# Altium PCB PC110-itx.PcbDoc (part 14 of 16)
Units mm, origin at the board's own origin, x right, y up, seen from the top; angles counter-clockwise.
Board outline 170 x 170 mm, 16 copper layers (FC1, FC2, FC3, FC4, IP1, IC1, IC2, IP2, IP3, IC3, IC4, IP4, BC4, BC3, BC2, BC1), stack 3.903 mm thick; 935 components, 1357 nets, 4698 pads, 3240 vias.
Unrouted connection lines stored in the file: 552.
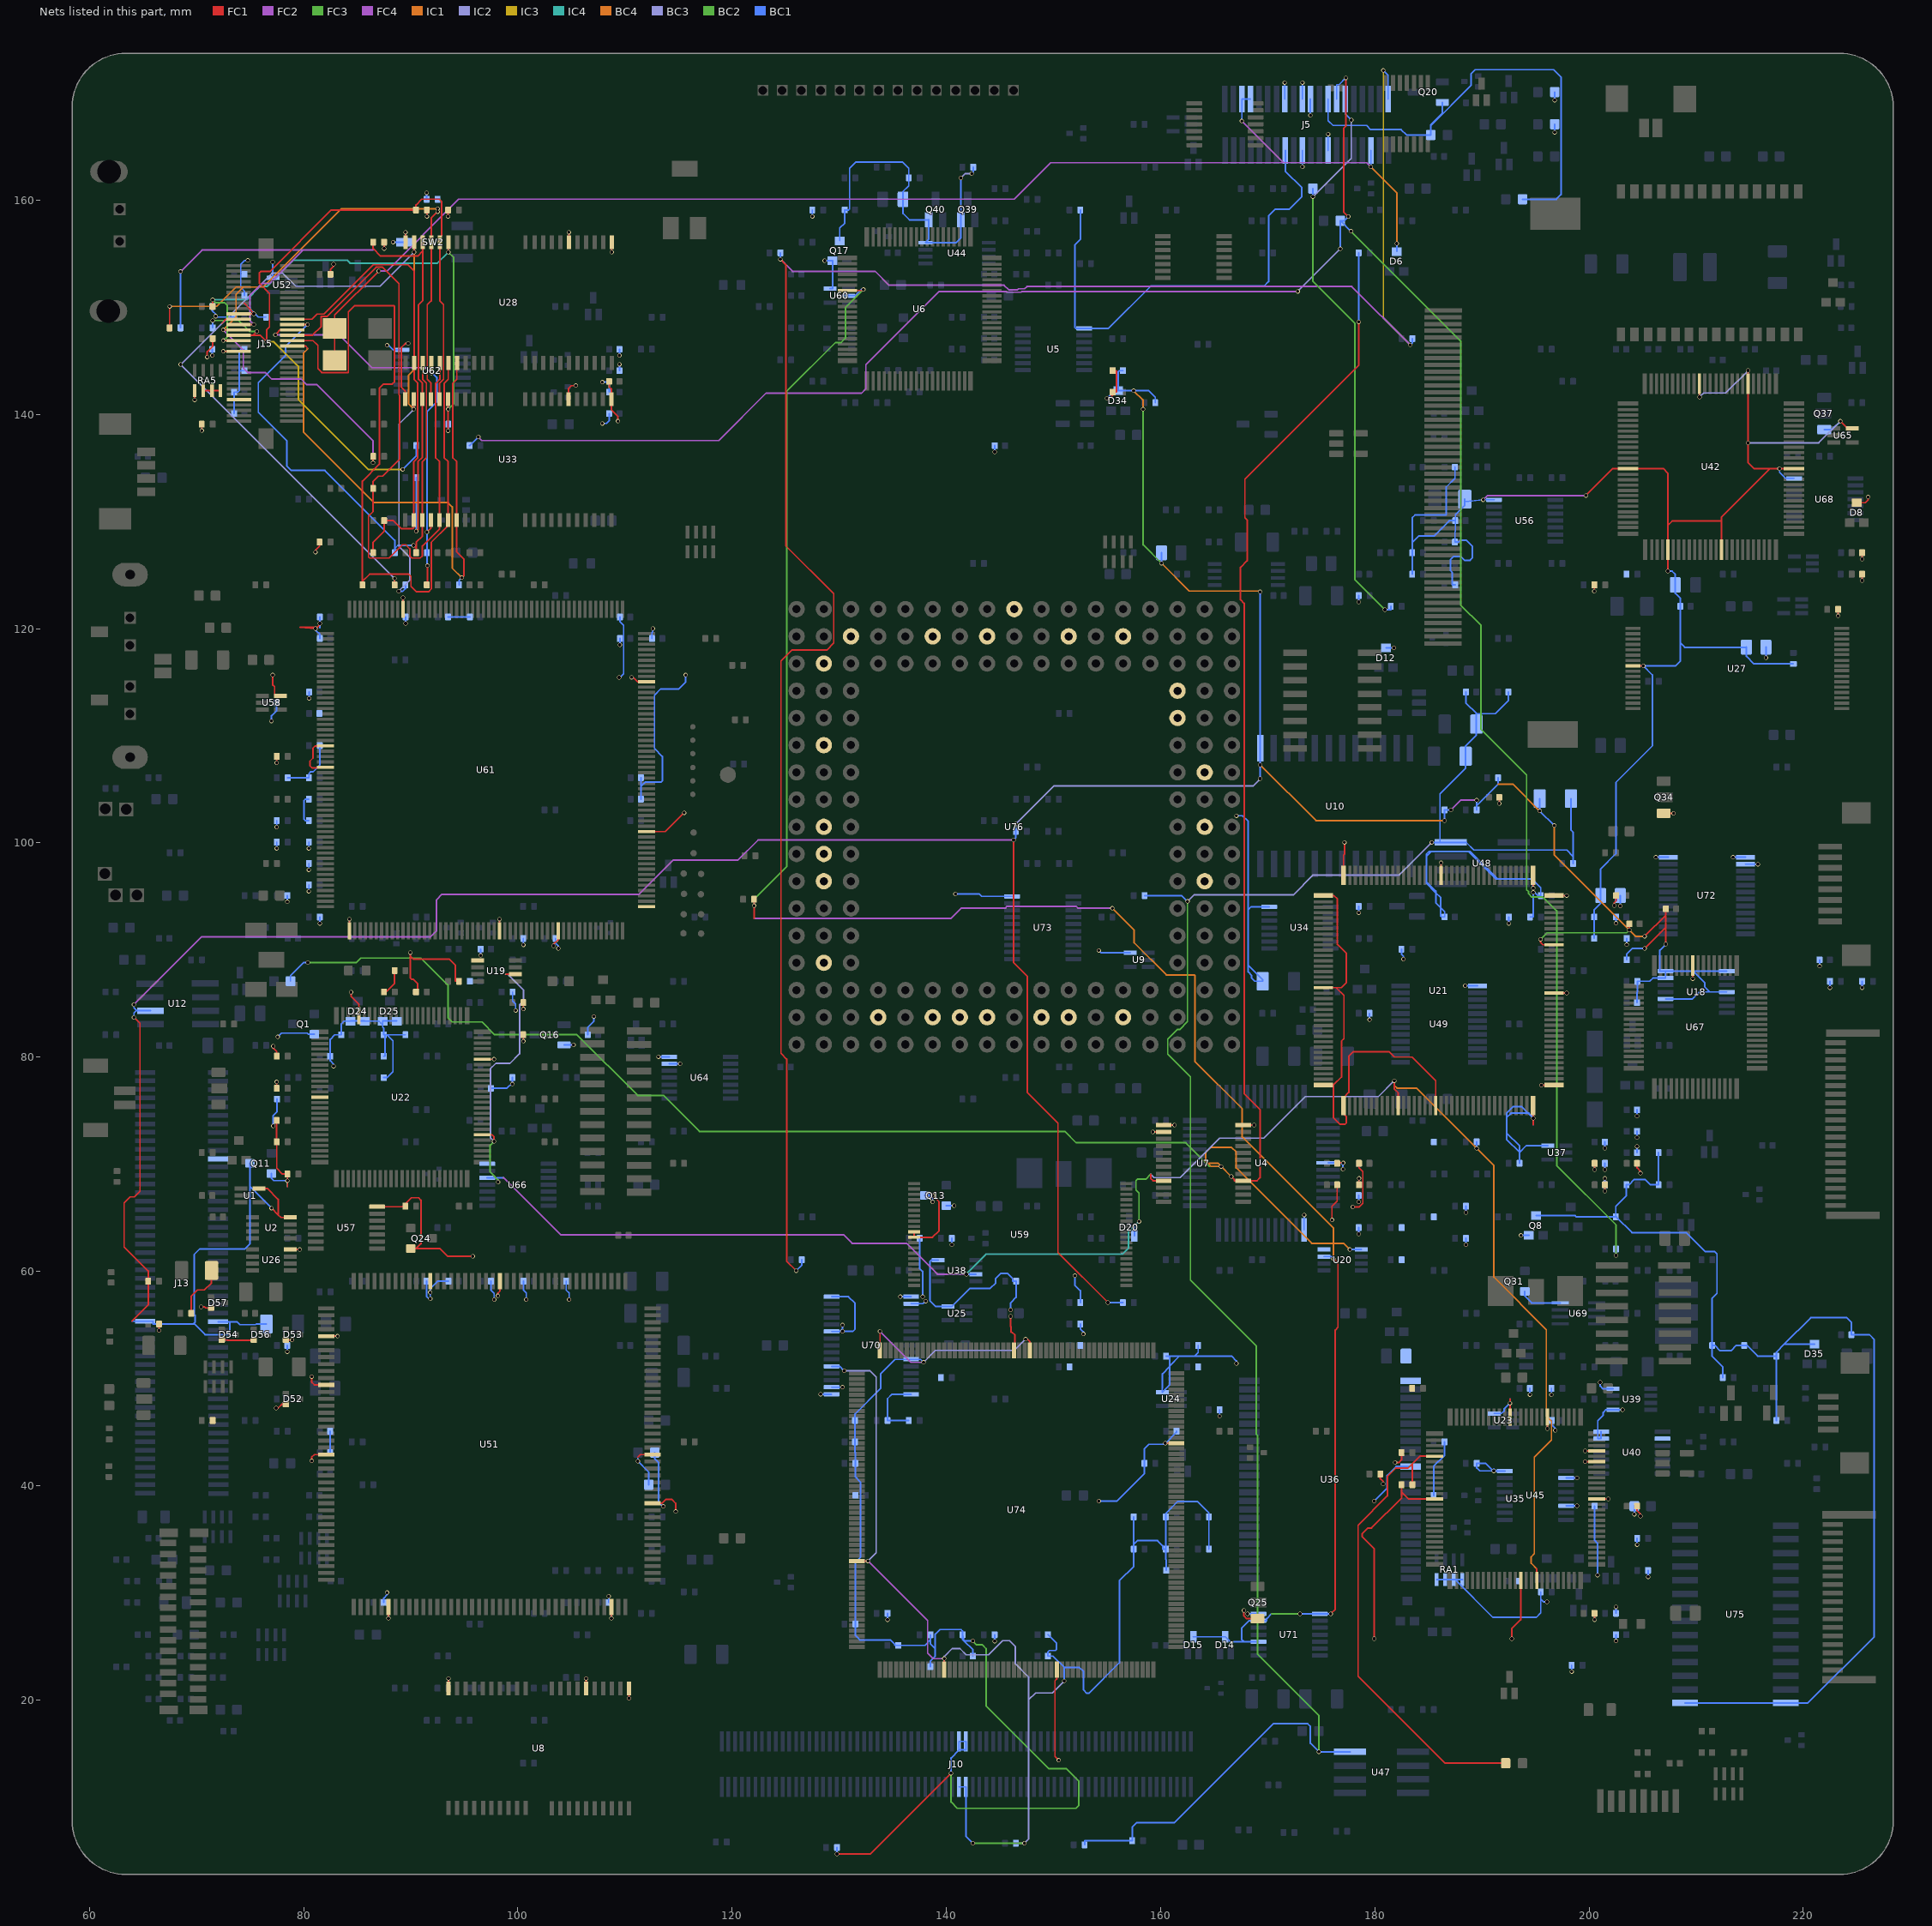
[diagram p27: the nets of this part, all layers, seen from the top]

## Via types
v1: diameter 0.4, hole 0.3, FC1 to BC1, 3240 vias

## Nets (pads, with @x,y where several pads share a name; then routed paths per layer and width w, separated by ;. In a path a pad name is that pad's centre, name@x,y a point inside that pad or via, vN(x,y) a via of type N, cw(c..) or ccw(c..) an arc to the next point about the centre after c; other vN are vias at no path point) (continued)
PNET1: C5.1 C17.1 C26.1 C31.2 C32.1 C34.1 C37.1 C38.1 C39.1 C40.1 C41.1 C42.2 C43.1 C64.2 C65.2 C69.1 C71.2 C72.1 C73.2 C74.2 C75.1 C77.2 C78.2 C83.1 C95.1 C101.2 C102.2 C103.1 C104.2 C105.1 C106.2 C107.2 C108.2 C109.2 C110.2 C111.1 C112.2 C113.2 C114.2 C115.2 C117.2 C121.1 C122.1 C123.1 C127.2 C128.1 C140.2 C156.2 C172.2 C208.2 C211.2 C212.1 C215.1 C219.1 C242.2 C247.1 C252.1 C253.1 C254.2 C255.2 C256.2 C274.1 C275.1 C280.2 D8.2 D44.1 D52.2 D53.2 D54.2 D56.2 D57.2 J5.8 J5.33 J15.5 J15.14 J15.21 L3.1 L6.2 Q13.2 Q31.2 R45.2 R59.2 R84.2 R94.1 R96.1 R102.1 R105.1 R109.1 R110.2 R117.1 R118.2 R120.1 R127.2 R148.2 R152.1 R156.1 R157.2 R158.2 R161.2 R162.2 R165.2 R173.1 R177.1 R182.1 R215.2 R216.1 R228.1 R229.2 R246.1 R249.1 R258.1 R287.2 R292.1 R310.2 R312.1 R349.2 R372.1 R393.1 R400.2 R401.2 R403.2 RA5.5 RA5.6 RA5.7 RA5.8 SW2.1 U7.1 U7.2 U8.1 U8.6 U8.20 U9.5 U19.1 U21.1 U21.18 U21.36 U21.37 U21.54 U21.72 U21.73 U21.90 U21.108 U21.109 U21.126 U21.144 U22.13 U22.70 U23.5 U25.5 U28.1 U28.6 U28.22 U33.1 U33.6 U33.22 U35.7 U35.14 U35.38 U35.64 U35.88 U35.95 U35.97 U37.5 U38.8 U39.5 U39.8 U40.2 U40.13 U40.14 U45.2 U45.6 U45.16 U49.1 U51.19 U51.29 U51.45 U51.52 U51.62 U51.86 U51.118 U51.132 U51.139 U52.5 U61.1 U61.94 U61.126 U61.130 U61.157 U61.185 U61.196 U62.14 U64.13 U64.14 U66.14 U67.57 U69.8 U70.15 U70.16 U70.17 U72.1 U72.2 U73.20 U74.27 U74.138 U74.195 U76.B7 U76.B9 U76.B11 U76.C4 U76.C5 U76.E2 U76.E16 U76.G2 U76.G16 U76.H16 U76.J1 U76.K2 U76.K16 U76.L16 U76.M2 U76.M16 U76.P16 U76.Q2 U76.R3 U76.R6 U76.R9 U76.R10 U76.R11 U76.R14 | length 420
  FC1 w0.15: v1(69.825,141.36) RA5.5@69.825,142.24 ; v1(70.435,56.693) 70.734,56.693 70.837,56.59 D57.2@71.35,56.59 ; v1(70.49,138.49) R102.1@70.49,139.09 ; v1(70.625,143.12) RA5.6@70.625,142.24 RA5.7@71.45,142.24 RA5.8@72.225,142.24 ; v1(71,145.367) 71,145.857 71.51,146.367 R157.2@71.51,147.09 ; D54.2@72.35,53.59 72.902,53.59 72.923,53.569 75.35,53.569 D56.2@75.35,53.59 ; v1(72.497,145.893) J15.14@73.928,145.893 ; J15.21@73.928,149.392 v1@75.351,149.392 ; 74.48,150.378 v1@75.354,149.396 ; v1(75.362,149.403) v1@75.355,149.396 ; v1(77.435,47.244) 77.613,47.244 77.959,47.59 D52.2@78.35,47.59 ; D53.2@78.35,53.59 v1(78.93,53.59) ; v1(80.75,42.305) 80.75,42.654 81.001,42.905 U51.62@82.13,42.905 ; v1(80.75,50.179) 80.75,49.656 81.001,49.405 U51.52@82.13,49.405 ; v1@81.102,119.873 v1(81.102,120.015) 79.654,120.142 81.28,120.142 v1@81.509,120.371 ; v1(81.102,127.155) 81.102,127.312 81.49,127.7 R94.1@81.49,128.09 ; U61.130@82.028,107.057 81.28,107.057 81.233,107.01 80.772,107.01 80.594,107.188 80.594,107.645 80.874,107.925 80.874,108.854 81.077,109.057 U61.126@82.028,109.057 ; U51.45@82.13,53.955 v1(83.175,53.955) ; R148.2@82.51,153.09 82.51,153.536 82.787,153.813 v1(82.787,154.025) ; U61.157@84.278,91.807 v1(84.278,92.887) ; v1(87.51,155.49) R401.2@87.51,156.09 ; v1(87.925,27.615) U51.86@87.925,28.66 ; U61.94@89.278,121.807 v1(89.278,122.887) ; U33.22@89.488,141.423 89.488,142.186 89.132,142.541 89.132,146.27 89.488,146.625 v1(89.764,146.625) ; U28.22@89.508,156.082 v1(89.508,157.013) ; v1(91.51,158.49) R400.2@91.51,159.09 ; v1@91.787,57.377 v1(91.825,57.445) ; v1(93.49,158.49) R105.1@93.49,159.09 ; U8.20@93.531,21.071 v1(93.531,22.001) ; U22.70@96.7,79.81 v1(97.78,79.81) ; v1(98.137,57.72) 98.137,57.977 98.325,58.165 U51.19@98.325,59.1 ; U61.185@98.278,91.807 v1(98.278,92.887) ; v1(103.327,90.392) 103.327,90.517 103.778,90.968 U61.196@103.778,91.807 ; U33.6@104.738,141.423 104.738,142.437 104.989,142.688 v1(105.409,142.688) ; U28.6@104.758,156.082 v1(104.758,157.013) ; U8.6@106.381,21.071 v1(106.381,22.001) ; C95.1@108.52,143.09 108.52,142.584 108.738,142.367 U33.1@108.738,141.423 108.738,140.419 109.346,139.81 v1(109.346,139.37) ; v1(108.725,27.615) U51.118@108.725,28.66 ; v1(108.758,155.152) U28.1@108.758,156.082 ; v1(110.381,20.141) U8.1@110.381,21.071 ; 111.19,42.654 111.441,42.905 U51.139@112.57,42.905 ; U51.132@112.57,38.355 113.448,38.355 113.803,38.71 114.383,38.71 114.738,38.355 v1(114.738,37.581) ; v1(145.999,55.804) 145.999,54.864 146.025,54.864 146.025,54.305 146.152,54.305 146.406,54.051 146.406,53.26 146.308,53.162 U74.27@146.308,52.619 ; U74.138@150.308,22.819 150.308,21.956 150.14,21.788 150.14,14.722 v1(150.495,14.367) ; v1(159.27,73.015) U7.2@160.288,73.015 ; U7.1@160.288,73.665 v1(161.305,73.665) ; v1(160.428,43.969) U74.195@161.458,43.969 ; U21.36@175.182,77.391 176.124,77.391 ; U21.18@175.209,86.488 176.378,86.488 ; U21.1@175.209,95.091 176.174,95.091 176.505,94.761 176.505,90.525 177.342,89.687 177.342,86.97 176.86,86.488 176.378,86.488 ; U21.144@177.082,96.966 177.082,98.876 177.165,98.959 v1(177.165,100.056) ; v1(179.934,25.705) 179.934,34.133 178.816,35.25 178.816,35.504 179.354,36.043 179.696,36.043 182.49,38.837 182.49,39.421 ; R158.2@180.51,41.09 180.51,40.644 180.787,40.367 v1(180.787,40.155) ; R228.1@182.49,40.09 182.49,39.421 ; U35.38@185.57,38.75 183.161,38.75 182.49,39.421 ; U21.54@185.682,75.491 185.682,77.817 183.489,80.01 181.839,80.01 181.331,80.518 178.003,80.518 177.571,80.086 177.571,76.708 177.082,76.219 U21.37@177.082,75.491 177.082,74.708 177.343,74.447 177.343,73.863 177.216,73.736 176.759,73.736 176.124,74.371 176.124,77.391 ; U21.126@186.182,96.966 v1(186.182,98.146) ; v1(191.615,103.677) C107.2@191.615,104.267 ; U35.14@192.62,46.4 192.62,48.09 ; v1(192.786,25.705) 192.786,26.649 193.62,27.483 U35.64@193.62,31.15 ; 194.782,73.701 194.782,74.295 U21.72@194.782,75.491 ; v1(194.782,95.38) U21.109@194.782,96.966 ; v1(195.552,77.391) U21.73@196.732,77.391 ; v1(196.12,45.32) U35.7@196.12,46.4 ; U21.90@196.732,85.991 v1(197.912,85.991) ; U21.108@196.732,95.091 v1(197.912,95.091) ; v1(199.64,42.25) U35.95@200.72,42.25 ; v1(199.64,43.25) U35.97@200.72,43.25 ; v1(200.51,27.49) R127.2@200.51,28.09 ; v1(200.52,69.5) C105.1@200.52,70.09 ; U35.88@200.72,38.75 v1(201.8,38.75) ; v1(201.48,67.5) C101.2@201.48,68.09 ; v1(202.362,94.165) 202.362,94.437 202.52,94.595 C103.1@202.52,95.09 ; C112.2@204.48,38.09 204.48,37.669 204.787,37.362 v1(204.787,37.165) ; C104.2@204.48,70.09 204.48,69.669 204.787,69.362 v1(204.787,69.165) ; v1(209.685,87.328) U67.57@209.685,88.558 ; v1(223.25,121.2) R84.2@223.25,121.8 ; D8.2@224.98,131.76 225.794,131.76 226.045,132.011 v1(226.045,132.283) ; v1(225.48,124.5) C102.2@225.48,125.09 ; v1(225.48,126.5) C106.2@225.48,127.09 ; v1@75.351,149.392 v1@75.355,149.396 ; v1@75.351,149.392 v1(75.358,149.392) v1@75.355,149.396 ; 176.124,77.391 176.133,77.391 176.897,78.156 176.897,81.52 177.114,81.737 177.114,85.751 176.378,86.488
  BC1 w0.15: v1(71.48,145.5) C75.1@71.48,146.09 ; C69.1@71.48,150.09 71.48,149.67 71.787,149.362 71.787,149.235 v1(71.78,149.174) ; C280.2@73.52,140.09 C255.2@73.52,142.09 73.863,142.09 73.99,142.217 73.99,143.967 ; C109.2@73.52,149.09 v1@71.865,149.09 ; C43.1@74.48,144.09 74.113,144.09 73.99,143.967 ; C39.1@74.48,146.09 74.168,146.09 73.99,145.912 73.99,143.967 ; 74.48,150.378 75.768,149.09 R287.2@76.49,149.09 ; C122.1@74.48,151.09 74.48,151.513 74.125,151.868 74.125,154.022 74.48,154.377 v1(74.787,154.377) ; v1(77.114,154.229) 77.114,152.74 U52.5@77.15,152.74 ; v1(78.48,52.5) C252.1@78.48,53.09 ; v1@81.102,119.873 81.52,119.455 C71.2@81.52,119.09 ; v1@81.509,120.371 v1(81.509,120.498) 81.52,120.094 C117.2@81.52,121.09 ; C41.1@82.48,43.09 C38.1@82.48,45.09 ; C32.1@87.48,29.09 87.48,29.51 87.787,29.818 v1(87.787,30.015) ; v1(87.785,146.452) 87.93,146.452 88.342,146.04 U62.14@89.137,146.04 ; v1(88.345,156.09) SW2.1@89.425,156.09 ; v1(89.52,120.5) C156.2@89.52,121.09 ; C247.1@91.48,59.09 91.48,57.685 v1@91.787,57.377 ; R403.2@91.49,160.09 v1(91.49,160.69) ; v1(91.825,57.445) v1(91.821,58.039) 91.821,58.404 92.507,59.09 C127.2@93.52,59.09 ; C34.1@93.48,121.09 93.48,121.082 94.048,121.082 94.056,121.09 C172.2@95.52,121.09 ; v1(96.52,89.5) C77.2@96.52,90.09 ; C37.1@97.48,59.09 97.48,58.276 97.787,57.968 v1(97.787,57.377) ; C72.1@97.48,77.09 98.958,77.09 v1@99.49,77.622 ; v1(99.49,77.49) v1@99.49,77.622 ; R110.2@99.49,78.09 v1@99.49,77.622 ; R96.1@99.51,86.09 99.51,85.251 99.787,84.973 v1(99.787,84.367) ; v1(100.51,90.49) R249.1@100.51,91.09 ; C74.2@100.52,59.09 100.52,58.256 100.787,57.989 v1(100.787,57.377) ; R246.1@103.51,91.09 103.51,90.644 103.787,90.367 v1(103.787,90.155) ; R393.1@104.51,59.09 104.51,58.251 104.787,57.973 v1(104.787,57.367) ; v1(107.874,139.165) 108.269,139.165 108.52,139.416 C64.2@108.52,140.09 ; v1(107.874,143.015) 108.269,143.015 108.52,142.764 C108.2@108.52,142.09 ; C26.1@108.48,29.09 v1(108.48,29.68) ; v1(109.449,115.44) 109.52,115.44 109.875,115.795 109.875,120.312 109.52,120.667 C110.2@109.52,121.09 ; C121.1@109.48,144.09 v1(109.48,144.68) ; v1(109.48,145.5) C219.1@109.48,146.09 ; v1(109.52,118.5) C113.2@109.52,119.09 ; 111.19,42.654 v1(111.201,42.291) 112.213,41.28 L6.2@112.213,40.09 ; C17.1@111.48,104.09 111.48,105.258 ; C40.1@111.48,106.09 111.48,105.258 ; C254.2@112.52,119.09 112.52,119.625 112.598,119.703 v1(112.598,120.015) ; L3.1@112.787,43.09 112.787,42.502 113.143,42.147 113.143,38.418 113.498,38.063 v1(113.575,38.063) ; v1(113.12,80.04) U64.14@114.137,80.04 ; U64.13@114.137,79.39 v1(115.155,79.39) ; v1(115.672,115.672) 115.672,115.011 115.037,114.376 113.335,114.376 112.751,113.792 112.751,108.814 113.487,108.077 113.487,105.791 113.386,105.689 111.912,105.689 111.48,105.258 ; v1(128.27,48.54) U70.16@129.288,48.54 ; U70.17@129.288,49.19 v1(130.305,49.19) ; v1(134.51,27.49) R177.1@134.51,28.09 ; R162.2@136.49,46.09 136.49,46.076 134.51,46.076 R117.1@134.51,46.09 134.51,48.125 134.925,48.54 U70.15@136.713,48.54 ; U38.8@139.25,61.04 138.582,61.04 138.481,60.938 138.481,57.248 138.989,56.74 U25.5@140.15,56.74 140.538,56.74 142.218,58.42 144.094,58.42 144.602,58.928 144.602,59.334 145.085,59.817 145.694,59.817 146.177,59.334 146.177,59.09 R120.1@146.51,59.09 146.51,57.58 146,57.07 v1(146,56.402) ; Q13.2@140,66.14 v1(140.73,66.14) ; v1(140.51,62.49) R216.1@140.51,63.09 ; v1(140.848,95.24) 143.055,95.24 143.28,95.015 U73.20@146.137,95.015 ; v1(144.51,25.49) R312.1@144.51,26.09 ; v1(144.52,136.5) C65.2@144.52,137.09 ; v1(154.229,38.557) 155.905,38.557 158.49,41.142 R165.2@158.49,42.09 158.49,43.453 158.902,43.866 v1@160.376,43.866 ; v1(154.229,89.967) 154.456,89.74 U9.5@157.15,89.74 ; v1(160.428,43.969) v1@160.376,43.866 ; C5.1@161.48,45.09 161.48,44.97 160.453,43.944 v1@160.376,43.866 ; J5.8@171.59,169.45 v1(171.59,170.98) ; J5.33@175.64,164.65 v1(175.64,166.18) ; v1(179.51,83.49) R258.1@179.51,84.09 ; R349.2@182.49,90.09 182.49,89.599 182.677,89.412 v1(182.677,89.155) ; R161.2@185.49,39.09 185.49,41.804 186.51,42.824 R173.1@186.51,44.09 ; v1(188.445,86.665) U49.1@189.6,86.665 ; U23.5@191.15,46.74 191.821,46.74 192.075,46.994 192.075,47.168 v1(192.608,47.701) 192.62,48.09 ; U45.16@192.137,41.365 191.309,41.365 191.12,41.554 v1(191.11,41.377) v1@191.036,41.377 ; v1(192.51,92.49) R372.1@192.51,93.09 ; R109.1@193.51,70.09 193.51,71.12 ; Q31.2@194,58.14 194,57.709 194.644,57.065 U69.8@197.3,57.065 ; v1(194.48,48.5) C253.1@194.48,49.09 ; R118.2@194.49,93.09 194.793,93.09 v1@194.793,95.504 ; 194.782,73.701 v1(194.793,74.295) ; v1(194.782,95.38) v1@194.793,95.504 ; v1(194.793,95.783) 194.742,95.834 194.742,96.52 194.615,96.647 ; U37.5@196.15,71.74 194.13,71.74 193.51,71.12 ; v1(196.49,48.49) R229.2@196.49,49.09 ; C31.2@196.52,46.09 196.52,45.681 196.85,45.351 v1(196.85,45.165) ; v1(196.788,166.335) D44.1@196.788,167.09 ; U45.6@197.862,38.115 v1(198.88,38.115) ; U45.2@197.862,40.715 v1(198.88,40.715) ; C42.2@200.52,38.09 200.52,34.893 200.787,34.626 v1(200.787,31.653) ; v1(201.035,49.64) 201.035,49.291 201.286,49.04 U39.8@202.25,49.04 ; U40.13@201.138,44.39 U40.13@201.117,44.39 ; U40.14@201.138,45.04 201.117,45.04 U40.13@201.117,44.39 ; C128.1@201.48,68.09 v1(201.48,68.68) ; v1(201.48,69.5) C275.1@201.48,70.09 ; v1(201.48,71.5) C111.1@201.48,72.09 ; R156.1@202.51,28.09 v1(202.51,28.69) ; v1(202.52,25.5) C73.2@202.52,26.09 ; v1(202.52,92.5) C208.2@202.52,93.09 ; v1(202.913,94.11) R292.1@202.913,95.09 ; v1(203.13,47.09) U39.5@202.25,47.09 201.574,47.09 201.32,46.836 201.32,46.584 200.812,46.076 200.812,44.39 U40.13@201.117,44.39 ; v1(203.52,90.5) C211.2@203.52,91.09 ; v1(204.225,37.335) C140.2@204.225,38.09 ; C274.1@204.48,71.09 v1(204.48,71.68) ; v1(204.48,72.5) C215.1@204.48,73.09 ; v1(204.48,74.5) C212.1@204.48,75.09 ; v1(204.49,34.49) R215.2@204.49,35.09 ; v1(205.51,31.49) R152.1@205.51,32.09 ; v1(213.445,98.665) U72.1@214.6,98.665 ; U72.2@214.6,98.015 v1(215.755,98.015) ; v1(221.52,88.5) C256.2@221.52,89.09 ; v1(222.49,86.49) R45.2@222.49,87.09 ; v1(225.49,86.49) R59.2@225.49,87.09 ; v1(71.78,149.174) v1@71.865,149.09 ; v1(71.78,149.174) v1(71.787,149.165) v1@71.865,149.09 ; 184.81,96.393 184.81,98.755 ; 184.81,96.393 184.81,96.241 185.699,95.352 ; 184.81,96.393 185.699,95.504 185.699,95.352 ; 184.81,98.755 184.81,98.958 185.064,99.212 185.268,99.212 ; 184.81,98.755 185.268,99.212 ; 185.268,99.212 188.722,99.212 ; 185.699,95.352 186.131,94.92 186.131,93.98 ; 185.699,95.352 185.699,94.412 186.131,93.98 ; 186.131,93.98 186.131,93.192 186.233,93.09 C78.2@186.52,93.09 186.52,93.591 186.131,93.98 ; 188.722,99.212 188.874,99.212 191.44,96.647 ; 188.722,99.212 191.287,96.647 191.44,96.647 ; v1@191.036,41.377 189.789,41.377 189.51,41.655 R182.1@189.51,42.09 190.322,42.09 v1@191.036,41.377 ; 191.44,96.647 194.615,96.647 ; 192.303,72.936 192.303,74.371 ; 192.303,72.936 192.303,72.327 193.51,71.12 ; 192.303,72.936 193.51,71.73 193.51,71.12 ; 192.303,74.371 192.303,74.778 192.913,75.387 193.7,75.387 194.31,74.778 ; 192.303,74.371 192.71,74.778 194.31,74.778 ; 194.31,74.778 194.386,74.778 194.793,74.371 v1(194.793,74.295) ; 194.31,74.778 v1(194.793,74.295) ; 194.615,96.647 194.666,96.647 195.49,95.823 R310.2@195.49,95.09 195.207,95.09 194.849,95.447 v1@194.793,95.504
PNET2: C2.1 C3.1 C68.1 C203.2 C204.2 C205.1 C235.1 C237.1 D34.2 J13.21 J13.80 Q11.3 R28.2 R107.2 R108.1 R183.1 R195.1 R243.1 R244.1 R245.1 R256.2 R354.2 U1.5 U2.8 U10.1 U12.6 U18.1 U18.4 U18.10 U18.13 U18.14 U21.99 | length 396.8
  FC1 w0.15: 63.963,55.352 65.49,56.879 R183.1@65.49,59.09 65.49,60.046 63.246,62.29 63.246,66.396 63.805,66.954 64.211,66.954 64.719,67.462 64.719,83.16 v1(64.16,83.718) ; U1.5@75.85,67.74 76.606,67.74 77.622,66.724 77.622,65.294 ; v1(77.003,65.913) 77.622,65.294 ; U2.8@78.75,65.04 77.876,65.04 77.622,65.294 ; v1(146.279,100.279) 146.279,88.824 147.549,87.554 147.549,76.708 150.419,73.838 150.419,61.764 v1(155.092,57.09) ; v1(154.991,141.503) 155.245,141.503 155.52,141.779 C235.1@155.52,142.09 155.88,142.09 155.88,144.09 C3.1@155.52,144.09 ; v1(195.478,91.008) 195.478,90.694 195.682,90.491 U21.99@196.732,90.491 ; v1(203.764,91.866) C2.1@203.764,92.456 ; v1(205.181,90.145) 207.165,92.128 ; v1(205.184,91.285) 207.165,93.266 ; v1(207.165,90.55) 207.165,92.128 ; C237.1@207.165,93.853 207.165,93.266 ; 207.165,92.128 207.165,93.266
  FC2 w0.15: v1(64.16,84.912) 70.485,91.237 91.846,91.237 92.405,91.796 92.405,94.691 92.913,95.199 111.303,95.199 114.503,98.4 120.548,98.4 122.428,100.279 v1(146.279,100.279) ; v1(187.11,103.09) 188.008,103.988 v1(189.51,103.988)
  FC3 w0.15: v1(158.369,140.487) 158.369,127.828 v1(160.088,126.11)
  IC1 w0.15: v1(160.088,126.11) 162.678,123.52 169.224,123.52 v1(169.3,123.444) ; v1(196.759,101.625) 196.759,98.871 v1(203.764,91.866)
  IC2 w0.15: v1(146.49,101.778) 150.021,105.308 168.614,105.308 v1(169.3,105.994)
  BC2 w0.15: v1(195.478,91.008) 196.088,91.618 203.516,91.618 v1(203.764,91.866)
  BC4 w0.15: v1(157.48,142.215) 158.369,141.326 v1(158.369,140.487) ; v1(169.3,107.281) 174.498,102.083 v1(186.512,102.083) ; 191.51,105.492 191.51,105.49 192.882,105.49 v1(195.388,102.985) ; v1(203.764,91.866) 204.345,91.285 v1(205.184,91.285)
  BC1 w0.15: 63.963,55.352 J13.80@65.207,55.352 65.938,55.352 65.938,55.093 69.698,55.093 ; v1(64.16,83.718) 64.16,84.125 64.395,84.359 ; v1(64.16,84.912) 64.16,84.594 64.395,84.359 ; J13.21@72.008,55.303 72.993,55.303 ; Q11.3@75,70.09 75,67.916 ; C204.2@76.525,55.09 75.57,55.09 75.51,55.03 74.031,55.03 73.759,55.303 72.993,55.303 ; v1(77.003,65.913) 75,67.916 ; v1(146.279,100.279) 146.49,100.491 R354.2@146.49,101.09 v1(146.49,101.778) ; v1(154.991,141.503) 155.499,142.011 155.499,142.215 D34.2@156.05,142.215 ; v1(155.092,57.09) R107.2@156.49,57.09 ; C68.1@156.48,144.09 156.159,144.09 156.05,143.981 D34.2@156.05,142.215 ; R195.1@159.51,141.09 159.51,141.607 158.902,142.215 v1(157.48,142.215) D34.2@156.05,142.215 ; v1(160.088,126.11) R256.2@160.088,127.09 ; v1(169.3,105.994) v1(169.3,107.281) U10.1@169.3,108.84 v1(169.3,123.444) ; v1(186.512,102.083) 186.51,102.085 R245.1@186.51,103.09 v1(187.11,103.09) ; R244.1@189.51,103.09 189.51,103.492 ; v1(189.51,103.988) 189.51,103.492 ; R243.1@191.51,106.09 191.51,105.492 189.51,103.492 ; R28.2@195.388,104.14 v1(195.388,102.985) v1(196.759,101.625) ; C203.2@203.52,89.09 203.52,89.652 204.013,90.145 v1(205.181,90.145) ; C205.1@204.48,85.09 204.48,86.055 204.51,86.085 R108.1@204.51,87.09 205.664,87.09 205.964,87.39 U18.13@207.138,87.39 U18.14@207.138,88.04 ; U18.10@207.138,85.44 209.662,85.44 210.312,86.09 211.258,86.09 ; v1(207.165,90.55) 206.604,89.989 206.604,88.04 U18.14@207.138,88.04 ; U18.4@212.863,86.09 211.258,86.09 ; U18.1@212.863,88.04 209.702,88.04 ; 64.395,84.359 64.414,84.34 U12.6@65.7,84.34 64.395,84.359 ; 69.698,55.093 69.798,55.093 70.789,54.102 73.113,54.102 73.113,55.182 72.993,55.303 ; 69.698,55.093 69.875,55.27 69.875,55.908 69.779,56.005 69.779,61.574 70.307,62.103 74.517,62.103 75,62.586 75,67.916 ; U18.14@207.138,88.04 209.702,88.04 ; 209.702,88.04 210.785,86.957 210.785,86.563 211.258,86.09
PNET3: C136.1 D35.2 Q8.2 R196.2 R197.2 R198.2 R200.2 R201.2 R203.2 R204.2 R205.2 R206.2 U75.1 U75.28 | length 116.3
  BC1 w0.15: Q8.2@195.05,65.215 198.704,65.215 198.829,65.09 R196.2@202.49,65.09 ; R206.2@206.49,71.09 R201.2@206.49,68.09 205.722,68.09 205.232,68.58 204.223,68.58 203.733,68.09 R205.2@203.49,68.09 203.49,67.065 202.49,66.065 R196.2@202.49,65.09 ; U75.1@208.955,19.71 U75.28@218.38,19.71 220.421,19.71 226.619,25.908 226.619,53.645 226.174,54.09 C136.1@224.48,54.09 224.48,55.27 224.074,55.677 220.699,55.677 218.237,53.215 ; R198.2@212.49,50.09 212.49,51.079 211.49,52.079 R204.2@211.49,53.09 ; R197.2@217.49,46.09 R200.2@217.49,52.09 ; D35.2@221.05,53.215 218.237,53.215 ; R196.2@202.49,65.09 202.54,65.09 204.003,63.627 209.067,63.627 210.845,61.849 211.734,61.849 211.938,61.646 211.938,57.963 211.49,57.515 R204.2@211.49,53.09 ; R204.2@211.49,53.09 211.734,53.09 212.221,52.603 213.258,52.603 213.745,53.09 R203.2@214.49,53.09 214.732,53.09 215.732,52.09 R200.2@217.49,52.09 ; R200.2@217.49,52.09 217.49,52.468 218.237,53.215
PNET4: D6.2 D39.1 D55.1 J5.3 J5.4 J5.38 | length 125.8
  FC1 w0.15: D55.1@82.9,145.04 D39.1@82.9,148.04 82.9,149.276 v1(87.015,153.391)
  FC2 w0.15: v1(87.015,153.391) 87.77,153.391 94.476,160.096 146.355,160.096 149.758,163.5 171.476,163.5 ; v1(167.59,167.386) 171.476,163.5 ; v1(179.629,163.119) 179.248,163.5 171.476,163.5
  IC1 w0.15: v1@179.64,163.13 v1(179.629,163.119) 182.05,160.698 v1(182.05,155.948)
  BC1 w0.15: v1(167.59,167.386) J5.3@167.59,169.45 J5.4@168.39,169.45 ; v1@179.64,163.13 J5.38@179.64,164.65 ; D6.2@182.05,155.215 v1(182.05,155.948)
PNET5: C19.2 C33.1 C35.2 C84.1 C90.2 C91.1 C120.1 C243.1 C244.2 C265.2 C276.1 D12.2 D24.1 D24.3 D25.1 D25.3 D48.1 F2.2 J5.10 J5.11 J5.30 J13.40 Q1.2 Q8.1 Q11.2 Q16.2 Q17.1 Q24.2 Q25.3 Q34.3 R39.2 R47.1 R48.2 R50.1 R54.1 R55.2 R56.2 R64.1 R65.1 R88.2 R122.1 R123.1 R124.1 R125.2 R135.2 R188.2 R192.2 R193.2 R226.2 R302.1 R303.1 R305.1 R306.1 R307.1 R309.1 R311.2 R315.2 R363.2 U4.20 U4.27 U7.24 U20.8 U22.96 U26.8 U34.14 U57.14 U60.5 U70.1 U70.2 U70.25 U70.30 U71.14 U72.24 | length 144.9
  FC1 w0.15: v1(66.51,54.49) R311.2@66.51,55.09 ; R135.2@69.51,56.09 69.51,57.709 70.069,58.268 70.74,58.268 71.4,58.928 F2.2@71.4,60.09 ; v1(77.165,81.025) 77.165,80.837 77.49,80.512 R124.1@77.49,80.09 ; R122.1@77.49,74.09 77.47,74.09 77.47,72.09 R307.1@77.49,72.09 77.49,69.629 78.029,69.09 R302.1@78.49,69.09 78.49,67.88 ; R123.1@77.49,77.09 v1(77.49,77.69) ; U26.8@78.75,62.04 v1(79.63,62.04) ; v1(84.426,86.063) 84.426,85.68 85.15,84.956 U22.96@85.15,83.86 ; U57.14@86.863,66.04 89.205,66.04 ; R303.1@87.49,86.09 87.706,86.09 88.49,86.874 R305.1@88.49,88.09 ; R306.1@89.49,66.09 89.49,66.04 89.205,66.04 ; v1(89.967,89.764) 89.967,89.408 ; Q24.2@90,62.14 90.512,62.14 ; R309.1@90.49,86.09 90.653,86.09 90.653,86.843 90.221,87.274 90.068,87.274 89.967,87.376 89.967,89.408 ; R192.2@94.51,87.09 94.158,87.09 94.158,88.595 93.599,89.154 90.221,89.154 89.967,89.408 ; v1(95.79,61.417) 93.438,61.417 92.715,62.14 90.512,62.14 ; v1(100.51,81.49) R193.2@100.51,82.09 ; v1(100.51,84.49) R188.2@100.51,85.09 ; U7.24@167.712,73.665 v1(168.73,73.665) ; v1(167.785,28.346) 167.785,27.841 168.036,27.59 Q25.3@169.05,27.59 ; v1(176,64.803) 176,66.095 176.48,66.575 C265.2@176.48,68.09 ; C90.2@176.48,70.09 176.48,70.129 v1(177.038,70.129) ; v1(177.952,66.015) 178.52,66.015 178.875,66.37 178.875,69.312 178.52,69.667 C91.1@178.52,70.09 ; C243.1@178.52,68.09 v1(178.52,68.68) ; Q34.3@206.965,102.767 v1(207.895,102.767) ; 89.205,66.04 90.043,66.878 90.729,66.878 90.957,66.65 90.957,62.586 90.512,62.14
  BC1 w0.15: Q11.2@77,69.14 77,68.682 77.203,68.478 v1(78.486,68.478) 78.49,67.88 ; v1(77.165,73.59) 77.165,74.551 77.52,74.906 C35.2@77.52,76.09 ; v1(77.573,81.89) 77.928,82.245 80.332,82.245 80.437,82.14 Q1.2@81,82.14 ; v1(82.787,79.165) 82.787,79.362 82.48,79.67 C276.1@82.48,80.09 82.48,81.664 82.906,82.09 C244.2@83.52,82.09 83.52,83.109 83.776,83.365 D24.1@84.375,83.365 84.375,83.388 85.7,83.388 D24.3@85.7,83.365 87.021,83.365 87.198,83.188 D25.1@87.375,83.011 ; C33.1@87.48,78.09 87.782,78.09 88.341,78.649 88.341,81.531 87.782,82.09 ; C84.1@87.48,80.09 87.605,80.09 C120.1@87.605,82.09 ; D25.3@88.7,83.365 88.7,83.388 87.375,83.388 D25.1@87.375,83.365 D25.1@87.375,83.011 ; R315.2@89.49,82.09 87.782,82.09 ; Q16.2@104.31,81.14 v1(105.2,81.14) ; C19.2@106.52,82.09 106.52,82.775 107.086,83.341 v1(107.086,83.803) ; v1(127.49,158.49) R39.2@127.49,159.09 ; v1(128.645,154.365) Q17.1@129.375,154.365 129.375,151.74 U60.5@129.15,151.74 ; U70.25@129.288,54.39 130.048,54.39 130.305,54.647 v1(130.305,55) ; U70.30@129.288,57.64 130.861,57.64 131.47,57.03 131.47,54.61 131.267,54.407 v1(130.302,54.407) ; v1(135.695,57.64) U70.1@136.713,57.64 ; U70.2@136.713,56.99 137.825,56.99 v1(138.065,57.23) ; v1(167.081,102.54) 167.64,102.54 168.173,102.006 168.173,93.761 ; v1(168.12,28.04) U71.14@169.137,28.04 ; U34.14@170.137,94.04 168.453,94.04 168.173,93.761 ; v1(173.24,163.12) J5.30@173.24,164.65 ; J5.10@173.24,169.45 v1(173.24,170.98) ; U4.27@173.4,63.89 v1(173.4,65.27) ; v1(173.99,167.92) J5.11@173.99,169.45 ; U4.20@175.65,70.14 176.791,70.14 177.03,69.901 v1(177.03,69.53) ; v1(178.49,63.49) R55.2@178.49,64.09 ; v1(178.49,66.49) R56.2@178.49,67.09 ; v1(178.49,93.49) R48.2@178.49,94.09 ; v1(178.49,122.49) R88.2@178.49,123.09 ; D12.2@181.05,118.215 v1(181.78,118.215) ; v1(188.51,62.49) R47.1@188.51,63.09 ; v1(188.51,65.49) R64.1@188.51,66.09 ; v1(193.645,63.365) Q8.1@194.375,63.365 ; v1(196.788,169.335) D48.1@196.788,170.09 ; v1(206.245,98.665) U72.24@207.4,98.665 ; D25.1@87.375,83.011 87.375,82.805 87.48,82.7 C120.1@87.48,82.09 C120.1@87.605,82.09 ; C120.1@87.605,82.09 87.782,82.09 ; 168.173,88.588 168.173,93.761 ; 168.173,88.588 168.173,87.96 168.504,87.63 168.504,87.376 168.79,87.09 R226.2@169.537,87.09 169.537,87.224 168.173,88.588
PNET6: C9.1 C14.1 C149.2 C151.1 R27.2 R28.1 R36.1 R37.1 R222.1 U47.8 U48.8 | length 187.9
  FC3 w0.15: v1(162.509,94.539) 162.509,83.312 161.782,82.584 161.564,82.584 160.665,81.686 160.665,80.27 162.785,78.151 162.785,59.185 168.935,53.036 168.935,44.799 169.062,44.671 169.062,24.257 174.777,18.542 v1(174.777,15.158)
  IC2 w0.15: v1(162.509,94.539) 163.119,95.148 172.39,95.148 174.244,97.003 182.27,97.003 v1(185.318,100.051)
  BC1 w0.15: R222.1@152.908,6.477 152.908,6.858 R27.2@157.353,6.858 157.353,8.128 157.759,8.534 161.265,8.534 170.51,17.78 173.736,17.78 173.99,17.526 173.99,15.945 v1(174.777,15.158) U47.8@177.694,15.158 ; R37.1@158.51,95.09 161.958,95.09 v1(162.509,94.539) ; v1(185.318,100.051) 185.329,100.04 U48.8@186.08,100.04 ; C149.2@188.52,114.09 188.52,113.045 189.475,112.09 189.475,112.065 ; C151.1@192.48,114.09 192.48,113.308 191.237,112.065 189.475,112.065 ; R28.1@198.312,104.14 198.312,101.213 198.51,101.016 198.51,98.755 ; R36.1@198.51,98.09 198.51,98.755 ; U48.8@186.08,100.04 186.08,104.597 188.475,106.992 C14.1@188.475,108.09 188.475,109.068 189.475,110.068 C9.1@189.475,111.09 189.475,112.065 ; U48.8@186.08,100.04 U48.8@187.1,100.04 188.544,100.04 189.245,99.339 197.926,99.339 198.51,98.755
PNET7: C76.1 C81.1 C249.2 C282.1 Q13.3 R97.2 R98.1 R112.1 R115.1 R130.1 R139.1 R144.1 R300.1 R304.2 R313.1 R316.1 R319.1 R323.1 R325.1 R365.2 R373.2 R374.2 R375.2 R376.2 R377.2 R378.2 R380.2 R381.2 R384.1 R387.1 R389.1 R391.1 R394.1 R396.1 RA1.5 RA1.6 RA1.7 RA1.8 U24.5 U36.25 U36.35 U58.5 U59.30 U59.31 U61.15 U61.43 | length 83.5
  FC1 w0.15: v1(77.114,115.672) 77.114,114.706 77.191,114.706 77.292,114.605 77.292,113.74 U58.5@77.85,113.74 ; v1(77.49,107.49) R323.1@77.49,108.09 ; v1(110.613,115.468) 110.758,115.468 111.169,115.057 U61.43@112.028,115.057 ; U61.15@112.028,101.057 113.757,101.057 v1(115.519,102.819) ; U59.30@137,63.69 136.982,63.69 136.982,63.19 U59.31@137,63.19 138.704,63.19 139.319,63.805 139.319,66.497 v1(138.735,67.081) ; v1(181.889,42.155) 182.239,42.155 182.49,42.406 R139.1@182.49,43.09 ; v1(200.49,123.49) R144.1@200.49,124.09
  BC1 w0.15: v1(77,111.377) 77,111.882 77.48,112.362 C81.1@77.48,113.09 ; v1(77.49,99.49) R378.2@77.49,100.09 ; v1(77.49,101.49) R376.2@77.49,102.09 ; v1(78.48,94.5) C76.1@78.48,95.09 ; R319.1@78.51,106.09 R375.2@80.49,106.09 80.49,106.477 80.642,106.629 80.874,106.629 81.51,107.266 R316.1@81.51,109.09 ; v1(80.49,95.49) R377.2@80.49,96.09 ; v1(80.49,97.49) R380.2@80.49,98.09 ; v1(80.49,99.49) R374.2@80.49,100.09 ; R381.2@80.49,102.09 80.155,102.09 80.035,102.21 80.035,103.963 80.162,104.09 R373.2@80.49,104.09 ; v1(80.52,113.5) C249.2@80.52,114.09 ; v1(81.51,92.49) R98.1@81.51,93.09 ; R325.1@137.51,63.09 137.51,60.282 137.787,60.005 v1(137.787,57.634) ; Q13.3@138,67.09 138.493,67.09 138.73,66.853 v1(138.73,66.48) ; v1(152,59.6) 152,58.717 152.51,58.207 R387.1@152.51,57.09 ; R115.1@152.51,55.09 152.51,54.645 152.787,54.367 v1(152.787,54.155) ; R396.1@160.51,52.09 160.858,52.09 ; R394.1@163.51,53.09 163.51,52.426 163.18,52.095 ; v1(165.51,46.49) R112.1@165.51,47.09 ; v1(167.081,51.41) 167.081,51.638 166.624,52.095 163.18,52.095 ; v1(179.934,38.557) 181.153,39.776 181.153,40.952 181.991,41.79 U36.35@183.34,41.79 ; RA1.8@185.775,31.24 185.775,31.242 RA1.7@186.55,31.242 ; RA1.5@188.175,31.24 187.987,31.24 187.985,31.242 RA1.6@187.477,31.242 ; R304.2@195.49,30.09 195.49,29.406 ; v1(196.063,29.155) 195.741,29.155 195.49,29.406 ; v1(198.372,22.641) R97.2@198.372,23.241 ; v1(216.512,117.3) R300.1@216.512,118.28 ; 160.833,51.105 160.858,51.13 160.858,51.181 ; 160.833,51.105 160.172,50.444 160.172,49.098 160.15,49.076 U24.5@160.15,48.74 160.172,48.74 160.833,49.4 160.833,51.105 ; 160.833,51.105 160.833,51.156 160.858,51.181 ; 160.858,51.181 161.767,52.09 ; 160.858,51.181 160.858,52.09 ; 160.858,52.09 161.767,52.09 ; 161.767,52.09 163.174,52.09 163.18,52.095 ; 161.767,52.09 161.773,52.095 163.18,52.095 ; RA1.7@186.55,31.242 RA1.6@187.375,31.242 ; RA1.7@186.55,31.242 RA1.7@186.55,31.24 186.946,31.24 186.969,31.217 187.375,31.217 RA1.6@187.375,31.24 RA1.6@187.375,31.242 ; RA1.6@187.375,31.242 RA1.6@187.477,31.242 ; RA1.6@187.477,31.242 191.008,27.711 195.072,27.711 195.49,28.129 195.49,29.406
PNET8: C118.1 C139.2 Q17.2 Q39.1 Q40.1 R171.1 R385.2 U44.8 | length 33.6
  BC3 w0.15: v1(141.35,162.076) 141.757,162.484 v1(142.367,162.484)
  BC1 w0.15: Q17.2@130.05,156.215 130.05,157.404 130.52,157.874 C139.2@130.52,159.09 130.861,159.09 130.962,159.192 130.962,162.966 131.572,163.576 135.88,163.576 136.49,162.966 R385.2@136.49,162.09 136.49,161.347 135.95,160.807 C118.1@135.95,160.09 135.95,158.766 136.55,158.166 Q40.1@138.35,158.166 ; Q40.1@138.35,158.19 Q40.1@138.35,158.166 ; v1(141.35,162.076) Q39.1@141.35,158.19 141.35,156.464 140.926,156.04 U44.8@138.05,156.04 138.35,156.34 Q40.1@138.35,158.166 ; v1(142.367,162.484) 142.51,162.627 R171.1@142.51,163.09
PNET9: C116.1 C278.2 C279.1 J10.104 J10.105 R166.1 R169.1 R170.1 R172.2 R175.2 R178.2 R379.2 U70.20 U74.88 U74.117 | length 125.8
  FC1 w0.15: U74.88@131.658,32.969 v1(132.688,32.969) ; U74.117@139.808,22.819 v1(139.808,23.851)
  FC2 w0.15: v1(132.688,32.969) 138.252,27.405 138.252,24.384 138.786,23.851 v1(139.808,23.851)
  IC2 w0.15: v1(139.808,23.851) 139.808,24.06 140.538,24.79 141.275,24.79 141.859,24.206 143.942,24.206 145.263,25.527 145.898,25.527 146.431,24.994 146.431,23.393 147.676,22.149 147.676,19.99 ; v1(147.295,6.627) 147.676,7.008 147.676,19.99 ; v1(151.003,21.768) 149.885,20.65 148.336,20.65 147.676,19.99
  BC2 w0.15: v1(142.469,6.627) v1(147.295,6.627)
  BC3 w0.15: v1(130.464,50.724) 132.893,50.724 133.452,50.165 133.452,33.733 v1(132.688,32.969)
  BC1 w0.15: U70.20@129.288,51.14 130.048,51.14 v1(130.464,50.724) ; J10.105@141.179,11.879 J10.104@141.829,11.879 141.829,7.267 v1(142.469,6.627) ; R166.1@146.494,6.627 v1(147.295,6.627) ; C116.1@149.48,26.09 149.485,26.09 150.291,25.283 150.291,24.74 150.165,24.613 149.608,24.613 149.48,24.486 C279.1@149.48,24.09 149.951,24.09 151.003,23.038 ; v1(151.003,21.768) 151.003,23.038 ; R175.2@157.49,37.09 157.49,34.544 ; C278.2@160.52,32.09 160.52,33.071 160.49,33.101 R379.2@160.49,34.09 ; R169.1@164.51,34.09 R170.1@164.51,37.09 164.51,37.445 163.424,38.531 161.607,38.531 160.49,37.415 R178.2@160.49,37.09 R379.2@160.49,34.09 ; 151.003,23.038 152.4,23.038 152.806,22.631 152.806,20.93 153.111,20.625 153.314,20.625 156.159,23.47 156.159,31.13 157.49,32.461 R172.2@157.49,34.09 157.49,34.544 ; 157.49,34.544 157.82,34.874 159.715,34.874 160.195,34.395 160.195,34.09 R379.2@160.49,34.09
PNET10: C87.1 C119.1 C126.1 J10.34 J10.35 R126.1 R163.1 R164.1 R168.1 R174.1 R176.1 R179.1 U70.10 U74.24 U74.52 | length 124.1
  FC1 w0.15: v1(129.796,5.613) 132.893,5.613 v1(140.437,13.157) ; U74.52@133.808,52.619 v1(133.808,54.407) ; v1(147.396,53.67) 147.579,53.67 147.808,53.442 U74.24@147.808,52.619
  FC2 w0.15: v1(133.808,54.407) 136.704,51.511 v1(137.871,51.511)
  IC2 w0.15: v1(137.871,51.511) 138.989,52.629 146.355,52.629 v1(147.396,53.67)
  BC2 w0.15: v1(140.437,13.157) 140.437,10.465 141.021,9.881 152.095,9.881 152.375,10.16 152.375,12.395 151.181,13.589 149.555,13.589 143.713,19.431 143.713,24.79 143.358,25.146 142.824,25.146 v1(142.469,25.502)
  BC1 w0.15: v1(129.796,5.613) R174.1@129.796,6.223 ; v1(137.871,51.511) 137.592,51.79 U70.10@136.713,51.79 135.204,51.79 133.883,50.469 133.883,49.089 131.48,46.685 C87.1@131.48,46.09 C126.1@131.48,44.09 131.48,43.083 131.51,43.053 R126.1@131.51,42.09 131.51,40.804 131.978,40.335 131.978,33.311 131.51,32.842 R179.1@131.51,27.09 131.51,26.01 131.916,25.603 134.772,25.603 135.179,25.197 135.179,25.09 R164.1@135.51,25.09 137.997,25.09 138.51,25.603 ; R163.1@138.51,23.09 138.51,23.624 138.963,24.077 138.963,24.787 ; R176.1@138.51,26.09 138.51,25.603 ; v1(140.437,13.157) 140.437,14.58 J10.35@141.179,15.322 ; v1(142.469,25.502) 141.658,25.502 ; C119.1@142.48,24.09 142.48,24.68 141.658,25.502 ; 138.51,25.603 138.51,25.24 138.963,24.787 ; 138.963,24.787 138.963,26.136 139.395,26.568 141.358,26.568 141.51,26.416 R168.1@141.51,26.09 ; J10.35@141.179,15.322 141.199,15.342 141.829,15.342 J10.34@141.829,16.129 J10.35@141.179,16.129 J10.35@141.179,15.322 ; R168.1@141.51,26.09 141.51,25.65 141.658,25.502 ; R168.1@141.51,26.09 141.658,25.502
PNET12: C94.1 C133.1 C236.1 C241.2 C262.2 C263.2 C271.1 F4.1 Q37.3 R134.2 R292.2 R300.2 R360.2 R361.2 R369.1 U27.8 U42.5 U42.15 U42.38 U42.56 U42.65 U42.88 U56.14 U65.5 U68.14 | length 164
  FC1 w0.15: v1(199.705,132.436) 202.219,134.95 U42.88@203.627,134.95 206.92,134.95 207.352,134.518 207.352,129.642 ; U27.8@204.08,116.54 v1(205.06,116.54) ; v1(207.352,125.374) U42.5@207.352,127.375 207.352,129.642 ; U42.65@210.302,142.875 210.302,141.64 v1(210.312,141.63) ; U42.15@212.352,127.375 212.352,130.04 ; v1(214.852,144.105) U42.56@214.852,142.875 v1(214.852,137.345) 214.852,135.49 215.392,134.95 216.898,134.95 ; U42.38@219.127,134.95 v1(217.78,134.95) 216.898,134.95 ; v1(223.462,139.37) 224.131,138.7 U65.5@224.55,138.7 ; 207.352,129.642 207.758,130.048 212.344,130.048 212.352,130.04 ; 212.352,130.04 212.352,130.404 216.898,134.95
  FC2 w0.15: v1(190.119,132.04) 190.515,132.436 v1(199.705,132.436)
  IC2 w0.15: v1(210.312,141.63) 210.693,142.011 212.758,142.011 v1(214.852,144.105) ; v1(214.852,137.345) 221.437,137.345 v1(223.462,139.37)
  BC1 w0.15: R361.2@183.49,125.09 R360.2@183.49,127.09 183.49,128.042 ; C94.1@187.48,135.09 187.48,134.036 186.665,133.22 186.665,130.656 186.614,130.605 183.743,130.605 183.49,130.353 183.49,128.042 ; R369.1@187.51,124.09 187.238,124.09 187.238,125.249 187.071,125.416 187.071,126.467 187.35,126.746 188.011,126.746 188.366,126.39 188.9,126.39 189.103,126.594 189.103,127.711 188.57,128.245 187.962,128.245 187.808,128.09 C271.1@187.48,128.09 187.48,129.057 187.52,129.097 C263.2@187.52,130.09 ; F4.1@188.4,132.09 F4.1@188.4,131.851 ; U56.14@191.137,132.04 v1(190.119,132.04) 188.426,131.854 F4.1@188.4,131.851 ; C236.1@200.48,91.09 C133.1@200.48,93.09 200.48,93.777 201.087,94.384 R292.2@201.087,95.09 201.087,97.582 202.514,99.009 202.514,105.664 205.918,109.068 205.918,115.682 v1(205.06,116.54) 208.082,116.54 208.52,116.978 208.52,118.669 ; v1(207.352,125.374) 207.758,125.374 208.05,125.083 C262.2@208.05,124.09 208.05,123.304 208.52,122.834 C241.2@208.52,122.09 208.52,118.669 ; R300.2@214.688,118.28 R300.2@214.688,118.262 ; v1(217.78,134.95) 217.78,134.602 218.342,134.04 U68.14@219.137,134.04 ; R134.2@219.07,116.72 215.392,116.72 214.688,117.425 R300.2@214.688,118.262 ; Q37.3@221.95,138.59 222.682,138.59 v1(223.462,139.37) ; 183.49,128.042 184.099,128.651 185.515,128.651 186.954,130.09 C263.2@187.52,130.09 ; C263.2@187.52,130.09 187.52,130.632 188.4,131.512 F4.1@188.4,131.851 ; 208.52,118.669 208.926,118.262 R300.2@214.688,118.262
PS2_L1_Pluto: L1.1 R228.2 U35.30 | length 44.1
  FC1 w0.15: R228.2@183.51,40.09 183.51,42.059 ; U35.30@185.57,42.75 184.201,42.75 183.51,42.059 ; L1.1@192.213,14.09 186.563,14.09 178.434,22.219 178.434,36.307 181.173,39.046 181.173,40.864 181.94,41.631 183.081,41.631 183.51,42.059
PSU_AUX_SW1: J5.28 R42.1 U5.1 | length 46
  BC1 w0.15: R42.1@152.51,159.09 152.51,156.345 151.994,155.829 151.994,148.142 152.095,148.04 U5.1@152.862,148.04 155.143,148.04 159.097,151.994 169.672,151.994 170.078,152.4 170.078,158.547 170.688,159.156 172.009,159.156 173.177,160.325 173.177,161.175 171.64,162.712 J5.28@171.64,164.65
PWRGD: D20.2 R314.1 U7.9 U19.6 U21.47 U22.56 U35.67 U38.3 U66.12 | length 187.4
  FC1 w0.15: U22.56@96.7,72.76 97.577,72.76 97.78,72.557 v1(97.78,72.15) ; 98.865,87.74 U19.6@99.75,87.74 ; 159.08,69.061 159.08,68.682 159.297,68.465 U7.9@160.288,68.465 ; v1(181.813,77.8) 181.813,77.051 182.182,76.683 U21.47@182.182,75.491 ; U35.67@195.12,31.15 195.12,32.23
  FC2 w0.15: 98.636,68.74 98.654,68.758 103.988,63.424 130.398,63.424 131.199,62.623 136.284,62.623 139.167,59.74 v1(141.87,59.74)
  FC3 w0.15: v1(97.78,72.15) 97.409,71.779 97.409,69.283 98.155,68.537 v1(98.155,68.334)
  IC1 w0.15: v1(189.51,71.49) 191.11,69.89 191.11,59.461 196.012,54.559 196.012,46.507 196.494,46.025 196.494,44.247 194.894,42.646 194.894,33.656 194.589,33.351 194.589,32.766 195.123,32.233 195.12,32.23
  IC2 w0.15: 159.08,69.061 159.384,68.758 161.823,68.758 165.506,72.441 169.647,72.441 173.533,76.328 180.341,76.328 v1(181.813,77.8)
  IC4 w0.15: v1(141.87,59.74) 143.75,61.62 156.464,61.62 156.997,62.154 156.997,63.678 v1(157.988,64.668)
  BC2 w0.15: v1(157.988,64.668) 157.988,67.31 157.709,67.589 157.709,68.478 157.836,68.605 158.623,68.605 159.08,69.063 159.08,69.061
  BC4 w0.15: v1(181.813,77.8) 181.813,77.367 182.067,77.113 183.887,77.113 v1(189.51,71.49)
  BC3 w0.15: v1(97.78,72.15) 97.434,72.496 97.434,78.918 97.942,79.426 99.263,79.426 100.152,80.315 100.152,84.887 100.533,85.268 100.533,86.258 99.06,87.732 98.857,87.732 98.865,87.74
  BC1 w0.15: U66.12@97.138,68.74 97.952,68.74 ; v1(98.155,68.334) 98.155,68.537 97.952,68.74 ; 98.636,68.74 97.952,68.74 ; v1(141.87,59.74) U38.3@142.75,59.74 ; D20.2@157.55,63.34 157.55,64.23 v1(157.988,64.668) ; v1(189.51,71.49) R314.1@189.51,72.09
PWRGD_shift: C248.1 R87.2 U7.16 U20.1 | length 217.5
  FC1 w0.15: v1(166.599,68.859) 166.903,68.555 166.903,68.465 U7.16@167.712,68.465 169.013,68.465 169.29,68.743 169.29,75.112 167.81,76.593 167.81,122.36 167.462,122.707 167.462,125.73 168.083,126.351 168.083,130.164 167.869,130.378 167.869,133.96 178.49,144.581 v1(178.49,148.645)
  BC2 w0.15: v1(80.391,88.824) 84.887,88.824 85.319,89.256 90.957,89.256 93.472,86.741 93.472,83.693 93.878,83.287 96.647,83.287 97.841,82.093 105.512,82.093 111.176,76.429 113.589,76.429 116.942,73.076 151.054,73.076 152.121,72.009 162.357,72.009 164.567,69.799 v1(165.659,69.799)
  BC4 w0.15: v1(166.599,68.859) v1(165.659,69.799) ; v1(177.673,62.04) 177.087,62.626 174.098,62.626 167.056,69.668 167.056,71.145 166.624,71.577 164.668,71.577 164.211,71.12 164.211,70.307 164.414,70.104 ; 164.414,70.104 164.719,69.799 v1(165.659,69.799) ; 164.414,70.104 165.354,70.104 v1(165.659,69.799)
  BC1 w0.15: C248.1@78.775,87.09 78.775,87.614 79.985,88.824 v1(80.391,88.824) ; v1(177.673,62.04) U20.1@178.75,62.04 ; v1(178.49,148.645) R87.2@178.49,155.09
PWRGD_shift_buff: D14.3 D15.3 R181.2 U6.27 U20.7 U60.2 U71.1 U71.10 U71.13 | length 194.9
  FC1 w0.15: 122.049,92.966 v1(122.049,94.142) R181.2@122.049,94.742 ; U6.27@130.76,151.575 v1@132.169,151.575 ; v1(175.88,28.04) 176.301,28.461 176.301,54.52 176.555,54.775 176.555,60.782 v1(176.149,61.189)
  FC3 w0.15: v1(122.049,94.142) 122.049,94.748 125.095,97.794 125.095,142.164 129.642,146.71 130.175,146.71 130.581,147.117 130.581,149.987 132.169,151.575 v1(132.258,151.663)
  IC1 w0.15: v1(155.499,93.904) 157.536,91.867 157.536,90.673 160.528,87.681 163.17,87.681 163.195,87.655 163.195,79.604 167.615,75.184 167.615,72.553 176.149,64.018 v1(176.149,61.189)
  FC4 w0.15: 122.049,92.966 122.047,92.964 140.437,92.964 141.376,93.904 145.491,93.904 145.669,94.082 152.121,94.082 152.298,93.904 v1(155.499,93.904)
  BC2 w0.15: 170.358,28.04 v1(173.025,28.04)
  BC1 w0.15: U60.2@130.85,151.09 131.481,151.09 132.055,151.663 v1(132.258,151.663) ; D15.3@163.05,25.89 D14.3@166.05,25.89 166.5,25.44 167.778,25.44 ; U71.10@169.137,25.44 167.778,25.44 ; 170.358,28.04 170.358,28.042 169.901,27.584 169.901,27.39 U71.13@169.137,27.39 168.25,27.39 167.562,26.702 167.562,25.656 167.778,25.44 ; v1(173.025,28.04) U71.1@174.862,28.04 v1(175.88,28.04) ; U20.7@175.25,61.39 175.948,61.39 v1(176.149,61.189)
Q43_2: C222.2 D51.1 J5.13 Q20.2 | length 45.6
  BC1 w0.15: J5.13@175.64,169.45 175.64,167.437 176.097,166.98 179.222,166.98 179.603,166.599 182.448,166.599 182.957,166.09 C222.2@185.225,166.09 185.225,166.962 ; Q20.2@186.31,169.14 186.31,168.141 185.225,167.056 185.225,166.962 ; D51.1@193.788,160.09 196.945,160.09 197.383,160.528 197.383,171.501 196.698,172.187 189.382,172.187 188.976,171.78 188.976,170.713 185.225,166.962
R73_2: C66.2 J5.15 R104.2 | length 53.8
  FC3 w0.15: v1(174.225,160.335) 174.225,152.419 178.13,148.514 178.13,124.587 v1(180.95,121.768)
  BC3 w0.15: v1(174.225,160.335) 177.8,163.91 v1(177.8,167.486)
  BC1 w0.15: v1(174.225,160.335) C66.2@174.225,161.09 ; J5.15@177.24,169.45 177.24,168.046 v1(177.8,167.486) ; v1(180.95,121.768) 181.49,121.768 R104.2@181.49,122.09
R284_2: C218.1 J5.14 R266.1 R281.2 | length 218.2
  FC1 w0.15: v1(177.292,171.425) 177.292,166.903 177.089,166.7 177.089,158.903 v1(177.521,158.471)
  FC3 w0.15: v1(177.775,157.099) 188.011,146.863 188.011,122.199 189.916,120.294 189.916,110.592 194.173,106.334 194.173,95.628 194.355,95.447 194.355,95.263 194.666,94.952 195.687,94.952 196.977,93.662 196.977,69.875 202.514,64.338 v1(202.514,61.493)
  FC4 w0.15: v1(96.311,137.897) 96.64,137.567 118.746,137.567 123.165,141.986 132.08,141.986 132.486,142.392 132.486,144.653 139.319,151.486 145.592,151.486 145.669,151.409 146.965,151.409 147.042,151.486 v1(172.796,151.486)
  BC3 w0.15: v1(172.796,151.486) v1(176.775,155.464)
  BC1 w0.15: R281.2@95.49,137.09 95.504,137.09 v1(96.311,137.897) ; J5.14@176.44,169.45 176.44,170.79 176.657,170.79 v1(177.292,171.425) ; v1(176.775,155.464) C218.1@176.775,158.09 C218.1@176.784,158.09 ; v1(177.521,158.471) 177.14,158.09 C218.1@176.784,158.09 ; v1(177.775,157.099) C218.1@176.784,158.09 ; R266.1@202.51,62.09 202.51,61.498 v1(202.514,61.493)
R412_1: J5.20 R409.1 R410.1 R412.1 | length 195.4
  FC1 w0.15: v1(124.51,154.49) 125.019,153.981 125.019,127.737 129.489,123.266 129.489,118.669 128.829,118.008 125.578,118.008 124.562,116.993 124.562,80.354 125.095,79.821 125.095,60.96 v1(125.984,60.071)
  IC3 w0.15: v1(180.797,172.11) 180.797,149 v1(183.307,146.49)
  FC4 w0.15: v1(124.51,154.49) 125.634,153.366 133.349,153.366 134.645,152.07 145.391,152.07 145.822,151.639 146.639,151.639 146.735,151.735 147.315,151.735 147.523,151.943 177.854,151.943 v1(183.307,146.49)
  BC1 w0.15: v1(124.51,154.49) R409.1@124.51,155.09 ; v1(125.984,60.071) 126.51,60.597 R410.1@126.51,61.09 ; v1(180.797,172.11) 181.24,171.668 J5.20@181.24,169.45 ; v1(183.307,146.49) 183.51,146.693 R412.1@183.51,147.09
RAM_A0: J15.17 R346.1 R400.1 R404.1 U28.18 U33.18 | length 76.8
  FC1 w0.15: J15.17@73.928,147.392 75.273,147.392 ; v1(75.633,147.752) 75.273,147.392 ; U33.18@92.687,141.423 92.687,142.926 93.066,143.304 93.066,150.241 92.708,150.599 U28.18@92.708,156.082 92.708,156.54 92.888,156.72 92.888,159.868 92.659,160.096 91.034,160.096 90.49,159.553 R400.1@90.49,159.09 82.585,159.09 76.844,153.349 75.997,153.349 75.87,153.223 75.87,152.247 76.81,151.308 76.81,148.184 76.556,147.93 v1(76.556,146.787) 75.95,147.392 75.273,147.392
  IC3 w0.15: v1(76.556,146.787) 77.216,146.787 79.502,144.501 79.502,141.402 86.03,134.874 v1(89.256,134.874)
  BC2 w0.15: v1(71.51,148.768) 73.939,148.768 74.955,147.752 v1(75.633,147.752)
  BC1 w0.15: R404.1@71.51,148.09 v1(71.51,148.768) ; v1(89.256,134.874) 90.51,136.128 R346.1@90.51,137.09
RAM_A1: J15.18 R338.1 R403.1 R406.1 U28.19 U33.19 | length 77
  FC1 w0.15: R406.1@67.49,148.09 v1(67.49,150.089) ; v1@72.497,147.893 J15.18@73.928,147.893 ; v1(86.487,135.493) 86.49,135.496 R338.1@86.49,136.09 ; U33.19@91.887,141.423 91.887,142.926 91.542,143.272 91.542,150.241 91.908,150.607 U28.19@91.908,156.082 91.908,158.329 v1(92.51,158.932)
  IC1 w0.15: v1(67.49,150.089) 71.882,150.089 73.685,151.892 74.371,151.892 ; v1(72.492,147.893) 73.685,149.086 73.685,151.206 74.371,151.892 ; v1(92.51,159.212) 83.52,159.212 76.2,151.892 74.371,151.892
  FC4 w0.15: v1(72.492,147.893) 72.497,147.893 74.371,146.019 74.371,144.323 74.778,143.916 76.403,143.916 77.013,143.307 79.756,143.307 80.289,142.773 81.255,142.773 86.487,137.541 v1(86.487,135.493)
RAM_A2: J15.19 R342.1 R401.1 R402.1 U28.20 U33.20 | length 73.4
  FC1 w0.15: J15.19@73.928,148.392 v1(75.358,148.392) ; R401.1@86.49,156.09 86.49,155.49 87.192,154.788 90.65,154.788 91.108,155.245 ; v1(90.51,129.099) 90.678,129.267 90.678,135.585 91.087,135.995 U33.20@91.087,141.423 91.087,142.923 90.729,143.281 90.729,150.243 91.108,150.622 91.108,155.245 ; U28.20@91.108,156.082 91.108,155.245
  FC2 w0.15: v1(68.51,153.34) 70.517,155.346 79.934,155.346 ; v1(75.358,148.392) 74.981,148.769 74.981,151.079 76.124,152.222 76.81,152.222 79.934,155.346 ; 86.49,155.49 86.487,155.346 79.934,155.346
  BC1 w0.15: R402.1@68.51,148.09 v1(68.51,153.34) ; v1(90.51,129.099) R342.1@90.51,134.09
RAM_A3: J15.20 R337.1 R405.1 U28.21 U33.21 | length 94.2
  FC1 w0.15: 72.365,148.512 72.746,148.893 J15.20@73.928,148.893 ; R337.1@88.49,124.09 v1(88.49,124.69) ; v1(90.288,140.492) U33.21@90.288,141.423 ; v1(90.308,155.154) U28.21@90.308,156.082
  IC1 w0.15: v1(90.288,140.492) 89.789,140.991 89.789,143.637 90.308,144.156 v1(90.308,155.154)
  IC2 w0.15: v1(68.517,144.663) 77.04,153.187 78.054,153.187 79.273,151.969 87.123,151.969 v1(90.308,155.154)
  BC3 w0.15: v1(68.517,144.663) v1(88.49,124.69) ; v1(88.876,123.495) 89.932,124.551 89.932,126.654 88.9,127.686 88.9,139.105 v1(90.288,140.492)
  BC1 w0.15: v1(88.876,123.495) 89.256,123.495 89.51,123.749 R405.1@89.51,124.09
RAM_A4: J15.41 R155.2 R334.1 U28.24 U33.24 | length 44.5
  FC1 w0.15: J15.41@78.928,148.893 80.772,148.893 81.255,149.375 81.913,149.375 86.513,153.976 89.737,153.976 90.308,153.405 U28.24@90.308,144.807 90.308,143.271 90.653,142.926 90.653,135.95 90.288,135.585 U33.24@90.288,130.148 90.288,129.438 90.186,129.337 89.129,129.337 88.375,130.09 R155.2@87.51,130.09 87.51,129.087 86.49,128.067 R334.1@86.49,127.09
RAM_A5: J15.42 R153.2 R333.1 U28.25 U33.25 | length 52.2
  FC1 w0.15: J15.42@78.928,148.392 v1(80.366,148.392) ; v1(90.255,127.778) 90.51,127.524 ; R153.2@90.51,127.09 90.51,127.524 ; U28.25@91.108,144.807 91.108,143.284 91.465,142.926 91.465,135.963 91.087,135.585 U33.25@91.087,130.148 91.087,128.653 90.51,128.075 90.51,127.778 90.51,127.524
  BC1 w0.15: v1(80.366,148.392) 78.303,146.329 78.303,145.491 75.768,142.957 75.768,140.208 78.435,137.541 78.435,135.179 78.842,134.772 81.982,134.772 88.51,128.245 88.51,127.49 ; R333.1@88.51,127.09 88.51,127.49 ; v1(90.255,127.778) 88.798,127.778 88.51,127.49
RAM_A6: J15.43 R150.1 R343.1 U28.26 U33.26 | length 40.6
  FC1 w0.15: v1(77.368,147.422) 77.546,147.599 77.775,147.893 J15.43@78.928,147.893 ; R150.1@91.49,124.09 91.567,124.09 v1(91.567,125.882) ; v1(91.51,129.026) 91.887,129.403 U33.26@91.887,130.148 ; v1(91.908,143.866) U28.26@91.908,144.807
  FC4 w0.15: v1(77.368,147.422) 83.337,147.422 86.385,144.374 91.4,144.374 v1(91.908,143.866) v1@92.024,143.866
  BC1 w0.15: v1(91.567,125.882) 91.51,125.939 R343.1@91.51,127.09 v1(91.51,129.026) 91.51,140.253 92.431,141.173 92.431,143.459 v1@92.024,143.866
RAM_A7: J15.44 R352.1 U28.27 U33.27 | length 66.3
  FC1 w0.15: J15.44@78.928,147.392 80.823,147.392 81.645,148.215 81.645,149.145 82.165,149.145 86.766,153.746 87.376,153.746 88.9,152.222 88.9,141.834 88.951,141.783 88.951,135.814 87.376,134.239 86.97,134.239 86.49,133.759 R352.1@86.49,133.09 86.49,130.94 86.055,130.505 86.055,126.695 86.157,126.594 87.96,126.594 89.205,127.838 89.535,127.838 89.916,127.457 89.916,126.797 90.119,126.594 90.881,126.594 91.084,126.797 91.084,127.734 92.687,129.337 U33.27@92.687,130.148 92.687,135.585 92.329,135.944 92.329,142.9 92.708,143.279 U28.27@92.708,144.807
RAM_A8: J15.45 R347.1 U28.28 U33.28 | length 75.8
  FC1 w0.15: J15.45@78.928,146.893 80.874,146.893 81.332,146.434 81.332,144.271 81.686,143.916 84.176,143.916 84.176,149.555 84.785,150.165 88.417,150.165 88.494,150.089 88.494,143.053 88.278,142.837 87.465,142.837 87.071,142.443 87.071,135.357 85.49,133.775 85.49,124.422 ; R347.1@85.49,124.09 85.49,124.422 ; U28.28@93.508,144.807 93.508,143.292 93.116,142.9 93.116,135.956 93.487,135.585 U33.28@93.487,130.148 93.487,129.632 91.923,128.067 91.923,123.723 91.643,123.444 90.526,123.444 90.018,123.952 90.018,124.885 89.814,125.089 86.157,125.089 85.49,124.422
RAM_A9: J15.46 R329.1 U28.29 U33.29 | length 54.8
  FC1 w0.15: J15.46@78.928,146.392 80.163,146.392 80.353,146.202 ; U28.29@94.308,144.807 94.308,143.304 93.929,142.926 93.929,135.943 94.287,135.585 U33.29@94.287,130.148 94.287,127.152 94.974,126.466 94.974,124.968 v1(94.771,124.765)
  BC4 w0.15: 80.353,146.202 80.353,146.101 79.985,145.732 79.985,138.354 86.563,131.775 93.472,131.775 93.878,131.369 93.878,125.657 v1(94.771,124.765)
  BC1 w0.15: R329.1@94.51,124.09 94.51,124.504 v1(94.771,124.765)
RAM_A10: J15.16 R151.2 R345.1 U28.17 U33.17 | length 50.7
  FC1 w0.15: R151.2@71.51,150.09 v1(71.51,150.698) ; v1(72.497,146.893) J15.16@73.928,146.893 ; v1(93.487,138.481) 93.487,140.487 v1@93.487,140.497 ; U33.17@93.487,141.423 v1@93.487,140.497 ; v1(93.497,140.487) v1@93.487,140.497 ; v1(93.508,155.152) U28.17@93.508,156.082
  FC3 w0.15: v1(71.51,150.698) 71.764,150.444 72.593,150.444 72.873,150.165 72.873,147.268 v1(72.497,146.893) ; v1(93.497,140.487) 94.005,140.995 94.005,154.655 v1(93.508,155.152)
  IC4 w0.15: v1(71.51,150.698) 74.675,150.698 75.945,151.968 76.606,151.968 79.045,154.407 84.049,154.407 84.328,154.127 92.482,154.127 v1(93.508,155.152)
  BC1 w0.15: v1(93.487,138.481) 93.51,138.503 R345.1@93.51,139.09